# Altium PCB HX-SMJ-03-B.pcbdoc (part 2 of 2)
Units mil, origin at the board's own origin, x right, y up, seen from the top; angles counter-clockwise.
Board outline 10479.57 x 2985.31 mil, 2 copper layers (Top Layer, Bottom Layer); 242 components, 163 nets, 634 pads, 340 vias.
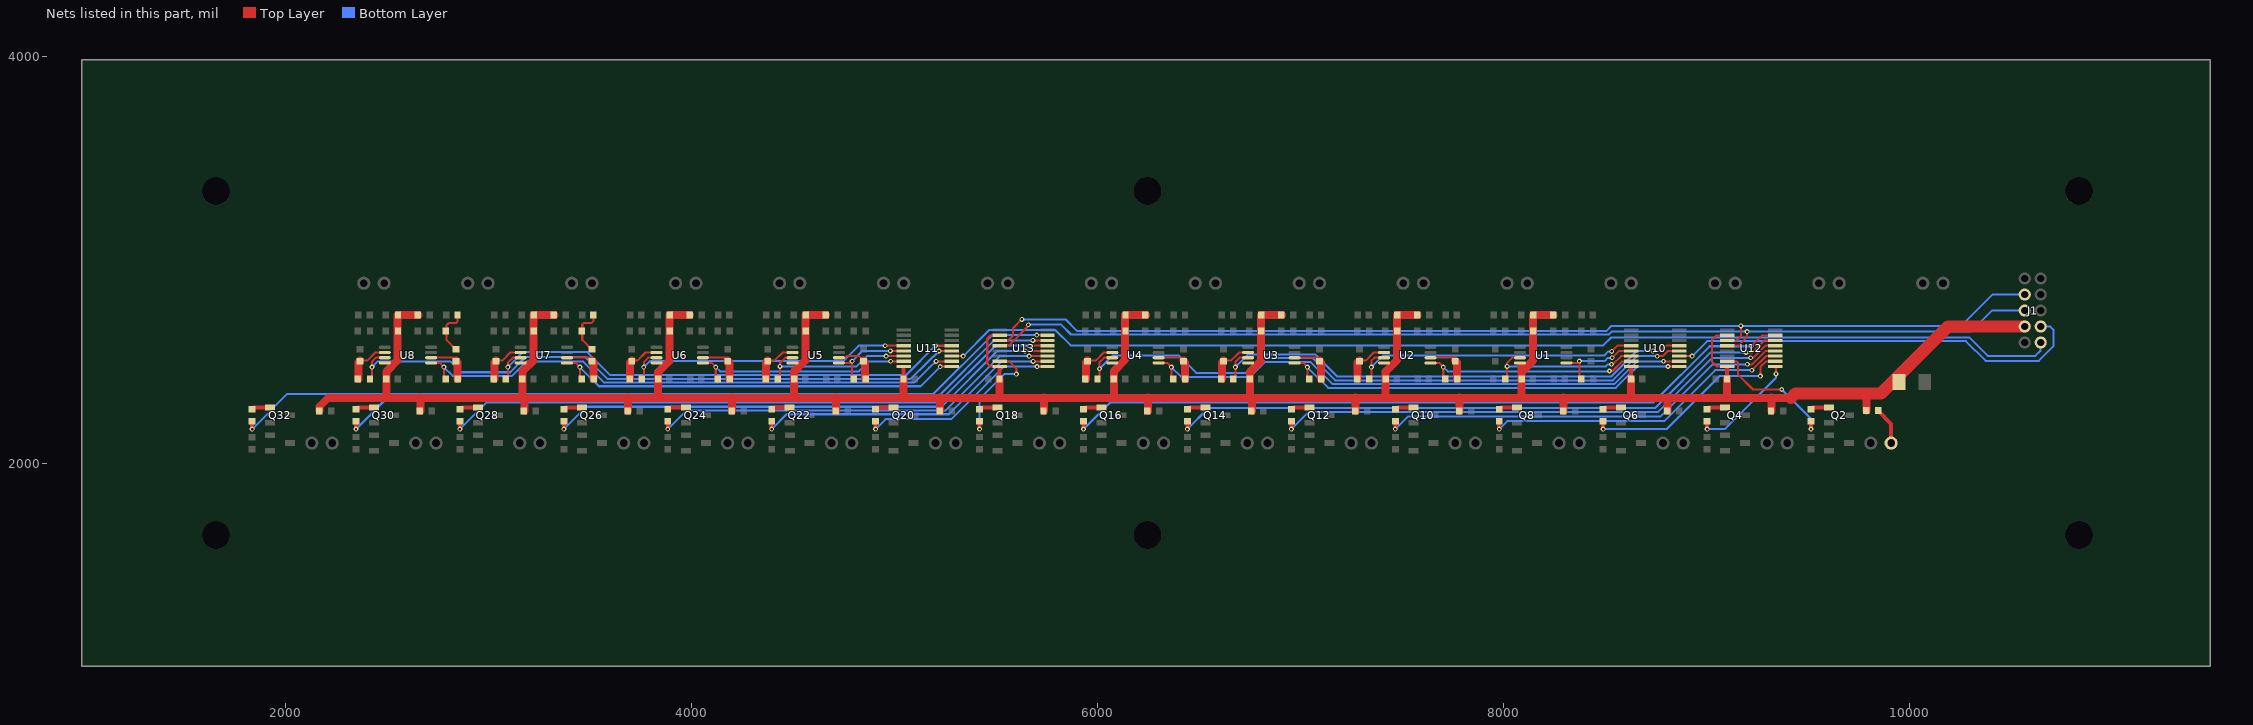
[diagram p2: the nets of this part, all layers, seen from the top]

## Via types
v1: diameter 24, hole 12, Top Layer to Bottom Layer, 328 vias
v2: diameter 27.56, hole 15.75, Top Layer to Bottom Layer, 12 vias

## Nets (pads, with @x,y where several pads share a name; then routed paths per layer and width w, separated by ;. In a path a pad name is that pad's centre, name@x,y a point inside that pad or via, vN(x,y) a via of type N, cw(c..) or ccw(c..) an arc to the next point about the centre after c; other vN are vias at no path point) (continued)
R68_2: C26.2 R64.2 R68.2 | length 233.9
  Top Layer w10: R64.2@3510.78,2559.59 3463.57,2606.79 3463.57,2650.09 3463.57,2682.39 3470.78,2689.69 3508.78,2689.69 3518.68,2699.49 C26.2@3518.68,2728.89
R78_2: C30.2 R74.2 R78.2 | length 232.8
  Top Layer w10: R74.2@2841.47,2559.59 2794.28,2606.79 2794.28,2650.09 2794.28,2677.59 2807.28,2690.69 2843.28,2690.69 2849.38,2696.69 C30.2@2849.38,2728.89
R81_2: D1.1 R81.2 | length 186.7
  Top Layer w19.68: R81.2@9844.17,2258.69 9909.17,2193.59 D1.1@9909.2,2098.93
R83_2: Q2.1 R83.2 | length 92.6
  Top Layer w19.68: R83.2@9514.67,2264.29 9524.58,2274.09 Q2.1@9603.3,2274.12
R86_2: Q4.1 R86.2 | length 92.6
  Top Layer w19.68: R86.2@9002.88,2264.29 9012.77,2274.09 Q4.1@9091.49,2274.13
R89_2: Q6.1 R89.2 | length 92.6
  Top Layer w19.68: R89.2@8491.08,2264.29 8500.98,2274.09 Q6.1@8579.68,2274.13
R92_2: Q8.1 R92.2 | length 92.7
  Top Layer w19.68: R92.2@7979.27,2264.29 7989.07,2274.09 Q8.1@8067.87,2274.12
R95_2: Q10.1 R95.2 | length 92.7
  Top Layer w19.68: R95.2@7467.48,2264.29 7477.27,2274.09 Q10.1@7556.06,2274.13
R98_2: Q12.1 R98.2 | length 92.7
  Top Layer w19.68: R98.2@6955.68,2264.29 6965.48,2274.09 Q12.1@7044.27,2274.09
R101_2: Q14.1 R101.2 | length 92.7
  Top Layer w19.68: R101.2@6443.88,2264.29 6453.68,2274.09 Q14.1@6532.48,2274.09
R104_2: Q16.1 R104.2 | length 92.6
  Top Layer w19.68: R104.2@5932.07,2264.29 5941.88,2274.09 Q16.1@6020.63,2274.12
R107_2: Q18.1 R107.2 | length 92.6
  Top Layer w19.68: R107.2@5420.27,2264.29 5430.07,2274.09 Q18.1@5508.82,2274.12
R110_2: Q20.1 R110.2 | length 92.6
  Top Layer w19.68: R110.2@4908.41,2264.28 R110.2@4918.25,2274.12 ; R110.2@4918.27,2274.09 Q20.1@4997.01,2274.12
R113_2: Q22.1 R113.2 | length 92.6
  Top Layer w19.68: R113.2@4396.57,2264.29 4406.48,2274.09 Q22.1@4485.2,2274.13
R116_2: Q24.1 R116.2 | length 92.7
  Top Layer w19.68: R116.2@3884.78,2264.29 3894.57,2274.09 Q24.1@3973.38,2274.12
R119_2: Q26.1 R119.2 | length 92.7
  Top Layer w19.68: R119.2@3372.97,2264.29 3382.78,2274.09 Q26.1@3461.57,2274.12
R122_2: Q28.1 R122.2 | length 92.7
  Top Layer w19.68: R122.2@2861.18,2264.29 2870.97,2274.09 Q28.1@2949.76,2274.12
R125_2: Q30.1 R125.2 | length 92.7
  Top Layer w19.68: R125.2@2349.38,2264.29 2359.18,2274.09 Q30.1@2437.95,2274.12
R128_2: Q32.1 R128.2 | length 92.7
  Top Layer w19.68: R128.2@1837.58,2264.29 1847.38,2274.09 Q32.1@1926.17,2274.09
RCLK: J1.5 U12.12 U13.12 | length 5306.6
  Top Layer w10: U13.12@5518.65,2578.27 5563.68,2578.29 5660.57,2675.19 v1@5660.57,2681.69 ; U12.12@9101.38,2578.29 9156.88,2578.29 9199.98,2621.39 v1@9199.98,2647.69
  Bottom Layer w10: v1(5660.56,2681.64) 5822.23,2681.64 5870.26,2633.61 8519.26,2633.61 8533.3,2647.64 v1(9199.97,2647.64) ; v1@9199.98,2647.69 10301.67,2647.69 10405.38,2751.39 J1.5@10567.08,2751.39
SRCLK: J1.3 U12.11 U13.11 | length 5337.4
  Top Layer w10: U13.11@5518.68,2603.89 5562.27,2603.89 5584.98,2626.59 5584.98,2664.09 v1@5628.57,2707.69 ; U12.11@9101.38,2603.89 9147.48,2603.89 9169.27,2625.69 v1@9169.27,2675.69
  Bottom Layer w10: v1(5628.56,2707.64) 5843.23,2707.64 5899.26,2651.61 8508.26,2651.61 8532.26,2675.61 v1(9169.26,2675.64) ; v1@9169.27,2675.69 10253.67,2675.69 10408.17,2830.19 J1.3@10567.08,2830.19
U2_2: R13.2 R14.1 U2.2 | length 222
  Top Layer w10: U2.2@7640.7,2519.2 7747.98,2519.19 R14.1@7762.77,2504.49
  Top Layer w39.37: R14.1@7762.68,2504.39 7770.57,2496.59 R13.2@7770.57,2413.89
U2_6: R15.2 R16.1 U2.6 | length 232.7
  Top Layer w10: R15.2@7290.27,2504.39 7321.77,2504.39 7362.07,2544.79 U2.6@7412.36,2544.8
  Top Layer w39.37: R16.1@7282.38,2413.89 7282.38,2496.59 R15.2@7290.27,2504.39
U3_2: R23.2 R24.1 U3.2 | length 222
  Top Layer w10: U3.2@6971.4,2519.21 7078.68,2519.19 R24.1@7093.48,2504.49
  Top Layer w39.37: R24.1@7093.48,2504.49 7101.27,2496.59 R23.2@7101.27,2413.89
U3_6: R25.2 R26.1 U3.6 | length 232.6
  Top Layer w10: R25.2@6620.98,2504.49 6657.88,2504.49 6698.27,2544.79 U3.6@6743.05,2544.81
  Top Layer w39.37: R26.1@6613.07,2413.89 6613.07,2496.59 R25.2@6620.98,2504.49
U4_2: R33.2 R34.1 U4.2 | length 222
  Top Layer w10: U4.2@6302.09,2519.21 6409.38,2519.19 R34.1@6424.18,2504.49
  Top Layer w39.37: R34.1@6424.18,2504.49 6431.98,2496.59 R33.2@6431.98,2413.89
U4_6: R35.2 R36.1 U4.6 | length 232.6
  Top Layer w10: R35.2@5951.68,2504.49 5992.07,2504.49 6032.38,2544.79 U4.6@6073.77,2544.79
  Top Layer w39.37: R36.1@5943.88,2413.89 5943.88,2496.59 R35.2@5951.68,2504.49
U5_2: R43.2 R44.1 U5.2 | length 228.1
  Top Layer w10: U5.2@4727.38,2519.19 4757.88,2519.19 4765.27,2526.59 4827.18,2526.59 R44.1@4849.38,2504.39
  Top Layer w39.37: R44.1@4849.38,2504.49 4857.18,2496.59 R43.2@4857.18,2413.89
U5_6: R45.2 R46.1 U5.6 | length 232.2
  Top Layer w10: R45.2@4376.88,2504.49 4409.68,2504.49 4451.68,2544.79 U5.6@4498.98,2544.81
  Top Layer w39.37: R46.1@4368.98,2413.89 4368.98,2496.59 R45.2@4376.88,2504.49
U6_2: R53.2 R54.1 U6.2 | length 222
  Top Layer w10: U6.2@4058,2519.21 4165.27,2519.19 R54.1@4180.07,2504.49
  Top Layer w39.37: R54.1@4180.07,2504.49 4187.98,2496.59 R53.2@4187.98,2413.89
U6_6: R55.2 R56.1 U6.6 | length 232.6
  Top Layer w10: R55.2@3707.57,2504.49 3734.68,2504.49 3774.97,2544.79 U6.6@3829.65,2544.81
  Top Layer w39.37: R56.1@3699.78,2413.89 3699.78,2496.59 R55.2@3707.57,2504.49
U7_2: R63.2 R64.1 U7.2 | length 221.9
  Top Layer w10: U7.2@3388.78,2519.19 3495.97,2519.19 R64.1@3510.78,2504.49
  Top Layer w39.37: R64.1@3510.78,2504.49 3518.68,2496.59 R63.2@3518.68,2413.89
U7_6: R65.2 R66.1 U7.6 | length 232.5
  Top Layer w10: R65.2@3038.38,2504.49 3069.57,2504.49 3109.97,2544.79 U7.6@3160.39,2544.81
  Top Layer w39.37: R66.1@3030.47,2413.89 3030.47,2496.59 R65.2@3038.38,2504.49
U8_2: R73.2 R74.1 U8.2 | length 221.9
  Top Layer w10: U8.2@2719.47,2519.19 2826.68,2519.19 R74.1@2841.47,2504.49
  Top Layer w39.37: R74.1@2841.47,2504.49 2849.38,2496.59 R73.2@2849.38,2413.89
U8_6: R75.2 R76.1 U8.6 | length 232.5
  Top Layer w10: R75.2@2369.07,2504.49 2404.57,2504.49 2444.97,2544.79 U8.6@2491.08,2544.82
  Top Layer w39.37: R76.1@2361.18,2413.89 2361.18,2496.59 R75.2@2369.07,2504.49
VCC: C1.1 C5.1 C9.1 C13.1 C17.1 C21.1 C25.1 C29.1 C34.2 C35.2 C36.2 C37.2 C38.2 J1.7 R1.1 R2.1 R7.2 R11.1 R12.1 R17.2 R21.1 R22.1 R27.2 R31.1 R32.1 R37.2 R41.1 R42.1 R47.2 R51.1 R52.1 R57.2 R61.1 R62.1 R67.2 R71.1 R72.1 R77.2 R81.1 R84.1 R87.1 R90.1 R93.1 R96.1 R99.1 R102.1 R105.1 R108.1 R111.1 R114.1 R117.1 R120.1 R123.1 R126.1 U1.8 U2.8 U3.8 U4.8 U5.8 U6.8 U7.8 U8.8 U10.16 U11.16 U12.10 U12.16 U13.10 U13.16 | length 15144.9
  Top Layer w10: U13.16@5518.68,2475.89 5472.77,2475.89 5457.98,2490.69 5457.98,2613.69 5473.77,2629.49 U13.10@5518.68,2629.49 ; U12.16@9101.38,2475.89 9050.27,2475.89 9027.98,2498.29 9027.98,2608.99 9048.38,2629.39 U12.10@9101.38,2629.39
  Top Layer w19.68: C37.2@5045.27,2409.69 U11.16@5045.77,2471.69 ; 5045.68,2322.59 C37.2@5045.72,2413.89 ; C35.2@5518.18,2409.59 U13.16@5518.27,2471.59 ; 5518.57,2322.59 C35.2@5518.57,2413.89 ; C36.2@8628.27,2410.69 U10.16@8628.48,2472.89 ; C34.2@9101.27,2410.69 U12.16@9101.77,2472.69
  Top Layer w39.37: R126.1@2168.88,2258.69 2168.88,2278.09 2212.28,2321.49 9416.67,2321.49 ; 2498.97,2322.59 C29.1@2499.02,2413.89 2498.97,2451.29 2554.07,2506.49 2554.07,2650.09 2554.07,2728.89 R71.1@2656.47,2728.89 ; R123.1@2666.28,2256.39 2666.28,2322.59 ; 3168.28,2322.59 C25.1@3168.32,2413.89 3168.28,2450.69 3223.38,2505.79 3223.38,2650.09 3223.38,2728.89 R61.1@3325.78,2728.89 ; R120.1@3178.07,2256.39 3178.07,2322.59 ; R117.1@3689.88,2256.39 3689.88,2322.59 ; 3837.57,2322.59 3837.57,2413.89 3837.57,2448.89 3892.68,2503.99 3892.68,2650.09 3892.68,2728.89 R51.1@3994.97,2728.89 ; R114.1@4201.68,2256.39 4201.68,2322.59 ; 4506.77,2322.59 C17.1@4506.82,2413.89 ; C17.1@4506.88,2413.89 4506.88,2451.19 4561.98,2506.29 4561.98,2650.09 4561.98,2728.89 R41.1@4664.27,2728.89 ; R111.1@4713.48,2256.39 4713.48,2322.59 ; 5045.68,2322.59 C37.2@5045.72,2413.89 ; R108.1@5225.38,2256.39 5225.38,2322.59 ; 5518.57,2333.19 C35.2@5518.57,2413.89 ; R105.1@5737.18,2256.39 5737.18,2322.59 ; 6081.68,2322.59 6081.68,2413.89 6081.68,2454.19 6136.77,2509.29 6136.77,2650.09 6136.77,2728.89 R31.1@6239.07,2728.89 ; R102.1@6248.98,2256.39 6248.98,2322.59 ; 6750.98,2322.59 6750.98,2413.89 6750.98,2449.49 6806.07,2504.59 6806.07,2650.09 6806.07,2728.89 R21.1@6908.38,2728.89 ; R99.1@6760.77,2256.39 6760.77,2322.59 ; R96.1@7272.57,2256.39 7272.57,2322.59 ; 7420.18,2322.59 C5.1@7420.22,2413.89 7420.18,2451.69 7475.27,2506.79 R17.2@7475.27,2650.09 ; R17.2@7475.38,2650.09 7475.38,2728.89 R11.1@7577.68,2728.89 ; R93.1@7784.38,2256.39 7784.38,2322.59 ; 8089.48,2322.59 C1.1@8089.52,2413.89 8089.48,2449.09 ; 8089.5,2477 8089.5,2449.09 ; R7.2@8144.57,2650.09 8144.57,2728.89 R1.1@8246.98,2728.89 ; 8145.57,2625.79 8145.57,2505.19 8089.48,2449.09 ; R90.1@8296.17,2256.39 8296.17,2322.59 ; 8628.67,2322.59 C36.2@8628.67,2413.69 ; R87.1@8807.98,2256.39 8807.98,2322.59 ; 9100.88,2322.59 C34.2@9100.88,2413.89 ; R84.1@9319.77,2256.39 9319.77,2322.59 ; R81.1@9788.98,2258.69 9788.98,2322.59
  Top Layer w59.05: 9416.67,2321.49 9437.77,2342.59 9859.38,2342.59 10189.38,2672.59 J1.7@10567.08,2672.59
X0: R3.1 U1.1 U10.13 | length 436.3
  Top Layer w10: U1.1@8310,2493.59 8365.17,2493.59 v1(8374.26,2502.64) 8374.27,2424.39 R3.1@8384.77,2413.89 ; v1@8535.27,2518.69 8536.67,2518.69 8570.77,2552.69 U10.13@8628.88,2552.68
  Bottom Layer w10: v1(8374.26,2502.64) 8498.26,2502.61 8514.26,2518.61 v1(8535.27,2518.64)
X01: R83.1 U12.15 | length 656.4
  Top Layer w10: U12.15@9101.38,2501.49 9147.67,2501.49 9155.58,2493.69 9155.58,2435.99 9228.98,2362.69 v1@9370.58,2362.69
  Top Layer w19.68: v1(9514.69,2167.82) 9514.7,2182.23 ; 9514.67,2182.19 R83.1@9514.67,2209.19
  Bottom Layer w10: v1(9370.57,2362.64) 9514.7,2218.52 v1(9514.69,2167.82)
X1: R6.2 U1.7 U10.14 | length 789.9
  Top Layer w10: R6.2@8006.77,2413.89 8018.27,2425.39 v1(8018.27,2476.64) 8018.27,2493.39 8044.07,2519.19 U1.7@8081.66,2519.19 ; v1(8532.26,2486.64) 8539.27,2486.59 8579.67,2527.09 U10.14@8628.88,2527.09
  Bottom Layer w10: v1(8018.27,2476.64) 8504.26,2476.61 8514.26,2486.61 v1(8532.26,2486.64)
X02: R86.1 U12.1 | length 543.1
  Top Layer w10: U12.1@9337.58,2475.89 9342.27,2471.19 v1@9342.27,2439.69
  Top Layer w19.68: v1(9002.89,2167.83) R86.1@9002.88,2209.19
  Bottom Layer w10: v1(9002.89,2167.83) 9090.16,2167.84 9342.27,2419.95 v1(9342.26,2439.64)
X2: R13.1 U2.1 U10.15 | length 1090.2
  Top Layer w10: U2.1@7640.7,2493.59 7683.07,2493.59 7703.68,2472.99 7703.68,2425.69 R13.1@7715.48,2413.89 ; v1(8522.26,2453.64) 8537.27,2453.59 8585.17,2501.49 U10.15@8628.88,2501.5
  Bottom Layer w10: v1(7703.69,2472.95) 7724.99,2451.64 8520.27,2451.64 v1(8522.26,2453.64)
X03: R89.1 U12.2 | length 1052.2
  Top Layer w10: v1@9265.38,2428.69 9265.38,2473.19 9293.67,2501.49 U12.2@9337.58,2501.49
  Top Layer w19.68: v1(8491.08,2167.83) R89.1@8491.08,2209.19
  Bottom Layer w10: v1(8491.08,2167.83) 8803.16,2167.81 9063.99,2428.64 v1(9265.4,2428.64)
X3: R16.2 U2.7 U10.12 | length 1486.9
  Top Layer w10: R16.2@7337.48,2413.89 7349.38,2425.69 7349.38,2472.99 7349.77,2503.69 7365.27,2519.19 U2.7@7412.36,2519.2 ; v1@8533.27,2550.69 8560.88,2578.29 U10.12@8628.88,2578.27
  Bottom Layer w10: v1(7349.35,2472.95) 7406.06,2529.61 8495.26,2529.61 8516.26,2550.61 v1(8533.26,2550.64)
X04: R92.1 U12.3 | length 1548.5
  Top Layer w10: v1@9223.58,2457.69 9292.98,2527.09 U12.3@9337.58,2527.09
  Top Layer w19.68: v1(7979.26,2167.83) R92.1@7979.27,2209.19
  Bottom Layer w10: v1(7979.26,2167.83) 8018.07,2206.64 8791.97,2206.64 9042.97,2457.64 v1(9223.57,2457.64)
X4: R23.1 U3.1 U10.1 | length 2052.2
  Top Layer w10: U3.1@6971.4,2493.61 7013.77,2493.59 v1(7034.4,2472.96) 7034.38,2425.69 R23.1@7046.18,2413.89 ; v1(8810.26,2475.91) U10.1@8865.1,2475.91
  Bottom Layer w10: v1(7034.4,2472.96) 7136.72,2370.64 8553.27,2370.64 8658.53,2475.91 v1(8810.26,2475.91)
X05: R95.1 U12.4 | length 2070.9
  Top Layer w10: v1@9201.58,2486.69 9224.88,2486.69 9290.88,2552.69 U12.4@9337.58,2552.69
  Top Layer w19.68: v1@7467.48,2167.79 R95.1@7467.48,2209.19
  Bottom Layer w10: v1(7467.44,2167.83) 7530.26,2230.64 8773.97,2230.64 9029.97,2486.64 v1(9201.57,2486.64)
X5: R26.2 U3.7 U10.5 | length 2479.7
  Top Layer w10: R26.2@6668.27,2413.89 6680.07,2425.69 6680.07,2472.99 6680.07,2497.89 6701.38,2519.19 U3.7@6743.05,2519.21 ; v1(8736.26,2552.64) 8772.27,2552.59 8797.88,2578.29 U10.5@8865.1,2578.27
  Bottom Layer w10: v1(6680.06,2472.95) 6742.76,2535.64 7072.27,2535.64 7181.27,2426.64 8531.73,2426.64 8657.73,2552.64 v1(8736.26,2552.64)
X06: R98.1 U12.5 | length 2593.3
  Top Layer w10: v1@9217.58,2518.69 9229.88,2518.69 9289.48,2578.29 U12.5@9337.58,2578.29
  Top Layer w19.68: v1@6955.68,2167.79 R98.1@6955.68,2209.19
  Bottom Layer w10: v1(6955.65,2167.83) 7040.46,2252.64 8761.97,2252.64 9027.97,2518.64 v1(9217.57,2518.64)
X6: R33.1 U4.1 U10.2 | length 2778.5
  Top Layer w10: U4.1@6302.09,2493.61 6344.48,2493.59 6365.07,2472.99 6365.07,2425.69 R33.1@6376.88,2413.89 ; v1(8788.26,2501.5) U10.2@8865.1,2501.5
  Bottom Layer w10: v1(6365.1,2472.95) 6413.36,2424.61 6752.06,2424.61 6826.06,2498.61 7049.26,2498.61 7159.26,2388.61 8545.26,2388.61 8658.16,2501.51 v1(8788.26,2501.5)
X07: R101.1 U12.6 | length 3115.7
  Top Layer w10: v1@9194.58,2545.69 9225.88,2545.69 9284.08,2603.89 U12.6@9337.58,2603.89
  Top Layer w19.68: v1@6443.88,2167.79 R101.1@6443.88,2209.19
  Bottom Layer w10: v1(6443.84,2167.82) 6547.66,2271.64 8746.97,2271.64 9020.97,2545.64 v1(9194.57,2545.64)
X7: R36.2 U4.7 U10.4 | length 3212.8
  Top Layer w10: R36.2@5998.98,2413.89 6010.77,2425.69 6010.77,2472.99 6010.77,2496.39 6033.57,2519.19 U4.7@6073.77,2519.19 ; v1(8757.26,2526.64) 8784.27,2526.59 8810.27,2552.69 U10.4@8865.1,2552.68
  Bottom Layer w10: v1(6010.77,2465.08) 6076.34,2530.64 6401.27,2530.64 6487.27,2444.64 6736.27,2444.64 6809.27,2517.64 7061.27,2517.64 7171.27,2407.64 8538.27,2407.64 8657.27,2526.64 v1(8757.26,2526.64)
X8: R43.1 U5.1 U11.13 | length 435.4
  Top Layer w10: U5.1@4727.38,2493.59 4784.27,2493.59 v1(4792.27,2501.64) 4792.27,2423.69 R43.1@4802.07,2413.89 ; v1(4981.27,2553.1) 5045.77,2553.09 U11.13@5046.21,2552.68
  Bottom Layer w10: v1(4792.27,2501.64) 4843.73,2553.1 v1(4981.27,2553.1)
X08: R104.1 U12.7 | length 3638.1
  Top Layer w10: v1@9220.58,2575.69 9274.38,2629.39 U12.7@9337.58,2629.39
  Top Layer w19.68: v1@5932.07,2167.79 R104.1@5932.07,2209.19
  Bottom Layer w10: v1(5932.02,2167.83) 6062.84,2298.64 8737.97,2298.64 9014.97,2575.64 v1(9220.57,2575.64)
X9: R46.2 U5.7 U11.14 | length 786.9
  Top Layer w10: R46.2@4424.18,2413.89 4437.27,2427.09 v1(4437.27,2476.64) 4437.27,2493.09 4463.38,2519.19 U5.7@4498.98,2519.21 ; v1(4959.88,2527.09) U11.14@5046.21,2527.09
  Bottom Layer w10: v1(4437.27,2476.64) 4814.36,2476.61 4864.86,2527.11 v1(4959.88,2527.09)
X09: R107.1 U13.15 | length 546.9
  Top Layer w10: U13.15@5518.68,2501.49 5565.68,2501.49 5601.57,2465.69 v1@5601.57,2438.69
  Top Layer w19.68: v1@5420.27,2167.79 R107.1@5420.27,2209.19
  Bottom Layer w10: v1(5420.22,2167.82) 5420.22,2316.89 5541.97,2438.64 v1(5601.56,2438.64)
X10: R53.1 U6.1 U11.15 | length 1090.2
  Top Layer w10: U6.1@4058,2493.61 4100.38,2493.59 4120.98,2472.99 4120.98,2425.69 R53.1@4132.77,2413.89 ; v1(4982.27,2501.5) U11.15@5046.21,2501.5
  Bottom Layer w10: v1(4120.99,2472.95) 4142.26,2451.61 4825.26,2451.61 4875.16,2501.51 v1(4982.27,2501.5)
X010: R110.1 U13.1 | length 1015.2
  Top Layer w10: v1(5703.01,2475.1) U13.1@5754.87,2475.91
  Top Layer w19.68: v1(4908.4,2167.82) R110.1@4908.38,2209.19
  Bottom Layer w10: v1(4908.4,2167.82) 4957.23,2216.64 5279.97,2216.64 5538.43,2475.1 v1(5703.01,2475.1)
X11: R56.2 U6.7 U11.12 | length 1483.6
  Top Layer w10: R56.2@3754.88,2413.89 3766.68,2425.69 3766.68,2472.99 3766.68,2497.49 3788.38,2519.19 U6.7@3829.65,2519.21 ; v1(4955.27,2578.27) U11.12@5046.21,2578.27
  Bottom Layer w10: v1(3766.66,2472.95) 3796.36,2502.61 4749.36,2502.61 4825.06,2578.31 v1(4955.27,2578.27)
X011: R113.1 U13.2 | length 1537.9
  Top Layer w10: v1(5684.01,2501.1) 5754.48,2501.09 U13.2@5754.87,2501.5
  Top Layer w19.68: v1(4396.6,2167.82) R113.1@4396.57,2209.19
  Bottom Layer w10: v1(4396.6,2167.82) 4469.42,2240.64 5268.97,2240.64 5529.43,2501.1 v1(5684.01,2501.1)
X12: R63.1 U7.1 U11.1 | length 2045.2
  Top Layer w10: U7.1@3388.78,2493.59 3431.07,2493.59 3451.68,2472.99 3451.68,2425.69 R63.1@3463.57,2413.89 ; v1(5226.27,2475.1) U11.1@5282.48,2475.89
  Bottom Layer w10: v1@3451.76,2472.91 3546.07,2378.61 5129.77,2378.61 v1(5226.27,2475.1)
  other v1: 3451.72,2472.95
X012: R116.1 U13.3 | length 2060.3
  Top Layer w10: v1(5664.01,2527.1) U13.3@5754.87,2527.09
  Top Layer w19.68: v1(3884.78,2167.82) R116.1@3884.78,2209.19
  Bottom Layer w10: v1(3884.78,2167.82) 3975.61,2258.64 5250.97,2258.64 5519.43,2527.1 v1(5664.01,2527.1)
X13: R66.2 U7.7 U11.5 | length 2637.8
  Top Layer w10: R66.2@3085.57,2413.89 3097.38,2425.69 3097.38,2472.99 3097.38,2494.19 3122.38,2519.19 U7.7@3160.39,2519.21 ; v1(5202.27,2578.1) U11.5@5282.27,2578.09 ; U11.5@5282.27,2578.1 U11.5@5282.43,2578.27
  Bottom Layer w10: v1(3097.39,2472.95) 3171.06,2546.61 3488.61,2546.61 3601.6,2433.61 5057.76,2433.61 v1(5202.27,2578.1) 5091.27,2467.11
X013: R119.1 U13.4 | length 2582.8
  Top Layer w10: v1(5643.01,2552.1) 5754.27,2552.09 U13.4@5754.87,2552.68
  Top Layer w19.68: v1(3372.97,2167.82) R119.1@3372.97,2209.19
  Bottom Layer w10: v1(3372.97,2167.82) 3482.8,2277.64 5232.97,2277.64 5507.43,2552.1 v1(5643.01,2552.1)
X14: R73.1 U8.1 U11.2 | length 2767.7
  Top Layer w10: U8.1@2719.47,2493.59 2761.78,2493.59 2782.47,2472.99 2782.47,2425.69 R73.1@2794.28,2413.89 ; v1(5206.27,2501.1) U11.2@5282.07,2501.09 ; U11.2@5282.03,2501.11 U11.2@5282.43,2501.5
  Bottom Layer w10: v1@2782.46,2472.91 2825.76,2429.61 3118.26,2429.61 3188.26,2499.61 3468.61,2499.61 3571.61,2396.61 5098.66,2396.61 5171.76,2469.71 v1(5206.27,2501.1)
  other v1: 2782.43,2472.95
X014: R122.1 U13.5 | length 3101.1
  Top Layer w10: v1@5667.98,2578.29 U13.5@5754.87,2578.27
  Top Layer w19.68: v1(2861.16,2167.82) R122.1@2861.18,2209.19
  Bottom Layer w10: v1(2861.16,2167.82) 2992.99,2299.64 5219.98,2299.64 5498.6,2578.27 v1(5663.99,2578.27)
X15: R76.2 U8.7 U11.4 | length 3182.7
  Top Layer w10: R76.2@2416.28,2413.89 2428.07,2425.69 2428.07,2472.99 2428.07,2499.89 2447.38,2519.19 U8.7@2491.08,2519.22 ; v1(5221.27,2552.1) U11.4@5281.88,2552.09 ; U11.4@5281.85,2552.11 U11.4@5282.43,2552.68
  Bottom Layer w10: v1(2428.09,2472.95) 2456.76,2501.61 2814.26,2501.61 2868.26,2447.61 3109.26,2447.61 3184.26,2522.61 3479.61,2522.61 3587.6,2414.61 5080.96,2414.61 5161.86,2495.61 v1(5221.27,2552.1)
X015: R125.1 U13.6 | length 3628.2
  Top Layer w10: v1@5682.57,2604.69 5754.07,2604.69 U13.6@5754.87,2603.86
  Top Layer w19.68: v1@2349.38,2167.79 R125.1@2349.38,2209.19
  Bottom Layer w10: v1@2349.38,2167.77 2502.18,2320.57 5208.98,2320.57 5492.98,2604.67 v1@5682.58,2604.67
  other v1: 2349.34,2167.82 5682.56,2604.64
X016: R128.1 U13.7 | length 4150.9
  Top Layer w10: v1@5701.57,2630.69 5753.68,2630.69 U13.7@5754.88,2629.49
  Top Layer w19.68: v1@1837.58,2167.79 R128.1@1837.58,2209.19
  Bottom Layer w10: v1(1837.54,2167.83) 2009.35,2339.64 5190.97,2339.64 5481.97,2630.64 v1(5701.56,2630.64)
X_IN3: J1.8 U10.3 | length 2094.7
  Top Layer w10: U10.3@8865.1,2527.09 v1(8929.26,2527.09)
  Bottom Layer w10: v1(8929.26,2527.09) 9002.88,2600.59 10277.17,2600.59 10374.38,2503.39 10636.38,2503.39 10708.38,2575.39 10708.38,2657.39 10693.17,2672.59 J1.8@10645.77,2672.59
X_IN4: J1.10 U11.3 | length 5552.5
  Top Layer w10: U11.3@5282.48,2527.09 v1(5339.27,2527.1)
  Bottom Layer w10: v1(5339.27,2527.1) 5467.77,2655.69 5793.27,2655.69 5869.27,2579.59 8492.27,2579.59 8532.27,2619.59 10293.17,2619.59 10384.38,2528.39 10619.38,2528.39 10645.77,2554.79 J1.10@10645.77,2593.89
pads on no net: U13.9

## Polygon pours and split planes (outlines as drawn)
GND on Bottom Layer (solid): 1522.58,1508.4 1522.58,3476.4 10971.58,3476.4 10971.58,1508.4
GND on Top Layer (solid): 1500,1507.35 1500,3475.34 10949,3475.34 10949,1507.35

## Keep-outs
Keep-Out Layer:
  lines w10: 1522.59,1646.2 ccw(c1660.38,1646.2) 1660.38,1508.4 ; 10833.61,1508.4 ccw(c10833.61,1646.2) 10971.41,1646.2 ; 10833.61,3476.91 cw(c10833.61,3339.11) 10971.41,3339.11 ; 1522.59,3339.11 cw(c1660.38,3339.11) 1660.38,3476.91 ccw(c1660.38,3339.11) 1522.58,3339.11

## Other copper
Top Layer:
  drawing of 551 lines, arcs and shapes, not listed
Bottom Layer:
  region net X01: 9523.7,2175.75 9505.7,2175.76 9509.7,2184.16 9519.7,2184.15
  region net X8: 4804.24,2500.88 4791.52,2513.61 4800.28,2516.72 4807.35,2509.65
  region net X9: 4445.22,2485.62 4445.19,2467.62 4453.59,2471.61 4453.61,2481.61
  region net X10: 4132.97,2473.66 4120.2,2460.97 4128.96,2457.83 4136.06,2464.88
  region net X11: 3778.64,2472.18 3765.93,2484.93 3774.7,2488.02 3781.76,2480.94
  region net X12: 3463.69,2473.7 3450.97,2460.97 3459.74,2457.86 3466.81,2464.94
  region net X13: 3109.36,2472.19 3096.64,2484.92 3105.41,2488.03 3112.48,2480.95
  region net X14: 2794.4,2473.7 2781.67,2460.97 2790.44,2457.86 2797.51,2464.93
  region net X15: 2440.07,2472.19 2427.35,2484.92 2436.12,2488.03 2443.18,2480.96
  region net D32_2: 2458.39,2740.84 2445.65,2728.13 2442.54,2736.9 2449.62,2743.96
  region net D31_2: 2764.87,2728.1 2752.15,2740.84 2760.92,2743.94 2767.98,2736.87
  region net D30_2: 3138.89,2728.1 3126.17,2740.84 3134.94,2743.94 3142.01,2736.87
  region net D29_2: 3430.13,2719.86 3430.12,2737.86 3438.52,2733.86 3438.52,2723.86
  region net D28_2: 3804.14,2719.86 3804.14,2737.86 3812.54,2733.86 3812.54,2723.86
  region net D27_2: 4103.46,2728.11 4090.73,2740.84 4099.5,2743.95 4106.57,2736.88
  region net D26_2: 4477.47,2728.12 4464.74,2740.84 4473.51,2743.96 4480.58,2736.88
  region net D25_2: 4768.71,2719.87 4768.71,2737.87 4777.11,2733.87 4777.11,2723.87
  region net IN_U6: 4054.02,2597.81 4054.02,2615.81 4045.62,2611.81 4045.62,2601.81
  region net IN_U8: 2495.08,2597.81 2495.08,2615.81 2503.48,2611.81 2503.48,2601.81
  region net IN_U8: 2715.44,2597.81 2715.44,2615.81 2707.04,2611.81 2707.04,2601.81
  region net IN_U7: 3168.34,2597.81 3168.34,2615.81 3176.74,2611.81 3176.74,2601.81
  region net IN_U7: 3379.85,2597.81 3379.85,2615.81 3371.45,2611.81 3371.45,2601.81
  region net IN_U5: 4722.13,2617.15 4722.13,2596.48 4712.48,2601.81 4712.48,2611.81
  region net IN_U5: 4504.14,2596.48 4504.13,2617.15 4513.78,2611.81 4513.78,2601.81
  region net IN_U6: 3833.67,2597.81 3833.66,2615.81 3842.06,2611.81 3842.06,2601.81
  region net X09: 5429.22,2175.75 5411.22,2175.76 5415.22,2184.16 5425.22,2184.15
  region net X08: 5944,2167.08 5931.27,2179.8 5940.04,2182.92 5947.11,2175.85
  region net X07: 6455.81,2167.07 6443.08,2179.79 6451.85,2182.91 6458.92,2175.84
  region net X06: 6967.62,2167.08 6954.89,2179.8 6963.66,2182.92 6970.73,2175.85
  region net X05: 7479.42,2167.08 7466.69,2179.8 7475.46,2182.92 7482.53,2175.85
  region net X04: 7991.23,2167.08 7978.5,2179.8 7987.27,2182.92 7994.34,2175.85
  region net X03: 8499.02,2176.82 8499,2158.82 8507.41,2162.81 8507.41,2172.81
  region net X02: 9010.83,2158.83 9010.82,2176.83 9019.22,2172.84 9019.22,2162.84
  region net X1: 8026.22,2485.62 8026.19,2467.62 8034.59,2471.61 8034.61,2481.61
  region net C2_1: 8357.21,2731.94 8342.59,2746.55 8353.19,2749.6 8360.26,2742.53
  region net R2_2: 8057.29,2722.47 8057.29,2743.14 8066.94,2737.8 8066.94,2727.8
  region net IN_U1: 8304.82,2617.15 8304.82,2596.48 8295.17,2601.81 8295.17,2611.81
  region net IN_U1: 8086.82,2596.48 8086.82,2617.15 8096.46,2611.81 8096.47,2601.81
  region net D20_2: 7388,2722.47 7388,2743.14 7397.64,2737.8 7397.65,2727.8
  region net D19_2: 7687.91,2731.93 7673.29,2746.55 7683.89,2749.6 7690.96,2742.53
  region net D22_2: 6723.35,2731.93 6708.73,2746.55 6719.33,2749.6 6726.4,2742.53
  region net D21_2: 7018.62,2731.94 7004,2746.55 7014.6,2749.6 7021.67,2742.53
  region net D24_2: 6054.05,2731.94 6039.43,2746.55 6050.03,2749.6 6057.1,2742.53
  region net D23_2: 6344.69,2722.47 6344.69,2743.14 6354.33,2737.8 6354.34,2727.8
  region net IN_U2: 7416.35,2597.81 7416.34,2615.81 7424.74,2611.81 7424.75,2601.81
  region net IN_U2: 7636.71,2597.81 7636.71,2615.81 7628.31,2611.81 7628.31,2601.81
  region net X0: 8382.22,2511.62 8382.19,2493.62 8390.59,2497.61 8390.61,2507.61
  region net X2: 7715.66,2473.7 7702.93,2460.97 7711.7,2457.86 7718.77,2464.93
  region net X3: 7361.33,2472.17 7348.63,2484.93 7357.4,2488.02 7364.46,2480.94
  region net X4: 7046.37,2473.71 7033.64,2460.98 7042.41,2457.87 7049.48,2464.94
  region net X5: 6692.04,2472.2 6679.32,2484.92 6688.08,2488.04 6695.15,2480.96
  region net X6: 6377.08,2473.66 6364.31,2460.97 6373.07,2457.83 6380.16,2464.88
  region net X7: 6022.75,2464.33 6010.02,2477.06 6018.79,2480.17 6025.86,2473.09
  region net IN_U3: 6747.05,2597.81 6747.05,2615.81 6755.45,2611.81 6755.45,2601.81
  region net IN_U3: 6967.4,2597.81 6967.4,2615.81 6959,2611.81 6959,2601.81
  region net IN_U4: 6298.11,2597.81 6298.1,2615.81 6289.71,2611.81 6289.7,2601.81
  region net IN_U4: 6077.76,2597.81 6077.76,2615.81 6086.16,2611.81 6086.16,2601.81
  region net X11: 4947.35,2587.29 4947.31,2569.29 4938.92,2573.31 4938.94,2583.31
  region net X8: 4973.33,2544.09 4973.32,2562.09 4964.93,2558.1 4964.92,2548.1
  region net X9: 4951.95,2536.1 4951.93,2518.1 4943.53,2522.11 4943.55,2532.11
  region net X10: 4974.33,2510.5 4974.32,2492.5 4965.92,2496.51 4965.93,2506.51
  region net X13: 5203.02,2566.12 5190.29,2578.85 5187.18,2570.08 5194.25,2563.01
  region net X13: 5203.01,2566.12 5190.29,2578.86 5187.17,2570.09 5194.23,2563.02
  region net X15: 5221.71,2540.11 5209.31,2553.16 5205.98,2544.47 5212.86,2537.22
  region net X_IN4: 5351.24,2526.34 5338.52,2539.08 5347.29,2542.18 5354.36,2535.11
  region net X14: 5206.44,2489.1 5194.34,2502.42 5190.81,2493.81 5197.54,2486.41
  region net X12: 5227.01,2463.12 5214.29,2475.85 5211.18,2467.08 5218.25,2460.01
  region net X016: 1849.51,2167.07 1836.78,2179.8 1845.55,2182.91 1852.62,2175.84
  region net X015: 2361.32,2167.02 2348.64,2179.8 2357.42,2182.88 2364.46,2175.78
  region net X014: 2873.14,2167.07 2860.42,2179.8 2869.18,2182.91 2876.25,2175.83
  region net X013: 3384.95,2167.07 3372.22,2179.79 3380.99,2182.91 3388.06,2175.84
  region net X012: 3896.76,2167.07 3884.03,2179.79 3892.8,2182.91 3899.87,2175.84
  region net X011: 4408.57,2167.07 4395.84,2179.79 4404.61,2182.91 4411.68,2175.84
  region net X010: 4920.38,2167.07 4907.65,2179.79 4916.42,2182.91 4923.49,2175.84
  region net X010: 5695.07,2466.1 5695.07,2484.1 5686.67,2480.1 5686.67,2470.1
  region net X011: 5676.07,2492.09 5676.07,2510.09 5667.67,2506.1 5667.67,2496.1
  region net X012: 5656.07,2518.1 5656.07,2536.1 5647.67,2532.1 5647.67,2522.1
  region net X013: 5635.07,2543.1 5635.07,2561.1 5626.67,2557.1 5626.67,2547.1
  region net X014: 5656.06,2569.27 5656.05,2587.27 5647.66,2583.27 5647.65,2573.27
  region net X015: 5674.65,2613.65 5674.61,2595.65 5666.22,2599.67 5666.24,2609.67
  region net X016: 5693.63,2621.64 5693.63,2639.64 5685.23,2635.64 5685.23,2625.64
  region net X09: 5593.63,2429.64 5593.63,2447.64 5585.23,2443.64 5585.23,2433.64
  region net QD4: 5673.98,2442.61 5673.9,2424.61 5682.32,2428.57 5682.36,2438.57
  region net RCLK: 5668.5,2672.64 5668.5,2690.64 5676.9,2686.64 5676.9,2676.64
  region net SRCLK: 5636.5,2698.64 5636.5,2716.64 5644.9,2712.64 5644.9,2702.64
  region net A: 5292.2,2723.64 5292.2,2741.64 5300.6,2737.64 5300.6,2727.64
  region net B: 5265.2,2749.64 5265.2,2767.64 5273.6,2763.64 5273.6,2753.64
  region net C: 5289.74,2776.14 5288.63,2794.11 5297.26,2790.64 5297.88,2780.64
  region net QD4: 8945.05,2601.65 8945.01,2583.65 8936.62,2587.67 8936.64,2597.67
  region net RCLK: 9207.93,2638.66 9207.87,2656.66 9216.29,2652.69 9216.32,2642.69
  region net RCLK: 9192.03,2638.64 9192.02,2656.64 9183.63,2652.64 9183.63,2642.64
  region net SRCLK: 9177.23,2666.66 9177.18,2684.66 9185.59,2680.69 9185.62,2670.69
  region net SRCLK: 9161.34,2666.63 9161.31,2684.63 9152.92,2680.61 9152.94,2670.61
  region net A: 8524.23,2710.61 8524.17,2692.61 8532.59,2696.59 8532.62,2706.59
  region net A: 8517.02,2689.66 8504.29,2702.38 8501.18,2693.61 8508.25,2686.55
  region net B: 8552.23,2736.61 8552.18,2718.61 8560.59,2722.59 8560.62,2732.59
  region net B: 8536.33,2718.64 8536.33,2736.64 8527.93,2732.64 8527.93,2722.64
  region net C: 8581.23,2761.61 8581.18,2743.61 8589.59,2747.59 8589.62,2757.59
  region net C: 8565.33,2743.64 8565.33,2761.64 8556.93,2757.64 8556.93,2747.64
  region net X3: 8525.34,2541.63 8525.31,2559.63 8516.92,2555.61 8516.94,2545.61
  region net X0: 8527.36,2509.62 8527.32,2527.62 8518.93,2523.61 8518.95,2513.61
  region net X1: 8524.34,2477.62 8524.31,2495.62 8515.92,2491.61 8515.94,2481.61
  region net X2: 8515.49,2443.73 8513.28,2461.6 8505.43,2456.64 8506.67,2446.64
  region net X5: 8728.33,2543.64 8728.33,2561.64 8719.93,2557.64 8719.93,2547.64
  region net X7: 8749.33,2517.64 8749.33,2535.64 8740.93,2531.64 8740.93,2521.64
  region net X6: 8780.33,2510.5 8780.32,2492.5 8771.92,2496.51 8771.93,2506.51
  region net X4: 8802.33,2466.91 8802.33,2484.91 8793.93,2480.91 8793.93,2470.91
  region net X08: 9212.63,2566.64 9212.62,2584.64 9204.23,2580.64 9204.23,2570.64
  region net X07: 9186.63,2536.64 9186.62,2554.64 9178.23,2550.64 9178.23,2540.64
  region net X06: 9209.63,2509.64 9209.63,2527.64 9201.23,2523.64 9201.23,2513.64
  region net X05: 9193.63,2477.63 9193.63,2495.63 9185.23,2491.64 9185.23,2481.64
  region net X04: 9215.63,2448.64 9215.62,2466.64 9207.23,2462.64 9207.22,2452.64
  region net X03: 9257.45,2419.64 9257.45,2437.64 9249.05,2433.64 9249.05,2423.64
  region net X02: 9351.27,2431.71 9333.27,2431.69 9337.27,2423.3 9347.27,2423.3
  region net X01: 9382.54,2363.39 9369.82,2350.66 9378.59,2347.55 9385.66,2354.63
  region net X_IN3: 8941.24,2526.32 8928.53,2539.07 8937.3,2542.17 8944.36,2535.09
  region net D21_2: 7996.32,2861.95 7996.32,2910.7 7973.57,2891.32 7973.57,2881.32
  region net D22_2: 7473.58,2888.36 7508.06,2853.89 7478.27,2851.5 7471.2,2858.57
  region net D32_2: 2412.3,2864.84 2363.55,2864.83 2382.93,2842.08 2392.93,2842.08
  region net D23_2: 6972.72,2861.95 6972.72,2910.7 6949.97,2891.32 6949.97,2881.32
  region net D20_2: 8508.12,2861.95 8508.11,2910.7 8485.37,2891.32 8485.37,2881.32
  region net D31_2: 2907.24,2854.71 2867.4,2882.81 2870.06,2853.09 2878.36,2847.24
  region net D24_2: 6460.92,2861.95 6460.91,2910.7 6438.17,2891.32 6438.17,2881.32
  region net R2_2: 9520.87,2888.38 9555.34,2853.91 9525.56,2851.52 9518.49,2858.59
  region net D25_2: 5938.18,2888.38 5972.63,2853.89 5942.84,2851.52 5935.78,2858.6
  region net C2_1: 10032.67,2888.38 10067.15,2853.91 10037.36,2851.52 10030.29,2858.59
  region net D26_2: 5437.32,2861.95 5437.32,2910.7 5414.57,2891.32 5414.57,2881.32
  region net D29_2: 3901.82,2861.95 3901.81,2910.7 3879.07,2891.32 3879.07,2881.32
  region net D27_2: 4914.58,2888.36 4949.06,2853.89 4919.27,2851.5 4912.2,2858.57
  region net D28_2: 4413.72,2861.95 4413.71,2910.7 4390.97,2891.32 4390.97,2881.32
  region net D19_2: 9009.08,2888.36 9043.56,2853.89 9013.77,2851.5 9006.7,2858.57
  region net D30_2: 3390.02,2861.95 3390.02,2910.7 3367.27,2891.32 3367.27,2881.32
  region net A: 10668.26,2928.62 10623.26,2928.67 10640.77,2940.99 10650.77,2940.98
  region net B: 10665.61,2807.63 10665.56,2852.63 10686.58,2835.15 10686.59,2825.15
  region net SRCLK: 10547.24,2852.65 10547.15,2807.65 10526.19,2825.19 10526.21,2835.19
  region net RCLK: 10547.19,2773.85 10547.12,2728.85 10526.15,2746.39 10526.17,2756.39
  region net C: 10665.62,2728.85 10665.55,2773.85 10686.58,2756.39 10686.59,2746.39
  region net X_IN3: 10665.59,2650.09 10665.58,2695.09 10686.58,2677.59 10686.58,2667.59
  region net X_IN4: 10668.26,2574.02 10623.26,2573.98 10640.77,2554.78 10650.77,2554.79
  pour cut-out: 1807.42,1500 1514.42,1500 1514.42,1792 1807.42,1792
  pour cut-out: 10686.57,1792.4 10979.57,1792.4 10979.57,1500.4 10686.57,1500.4
  pour cut-out: 6099.96,1792.4 6392.96,1792.4 6392.96,1500.4 6099.96,1500.4
  pour cut-out: 10686.57,3485.31 10979.57,3485.31 10979.57,3193.31 10686.57,3193.31
  pour cut-out: 6099.96,3485.31 6392.96,3485.31 6392.96,3193.31 6099.96,3193.31
  pour cut-out: 1513.35,3485.31 1806.35,3485.31 1806.35,3193.31 1513.35,3193.31

## Silkscreen, mask and mechanical layers (free items; w line width, h text height)
Top Overlay:
  circle w10: c1660.38,1646.2 r137.8
  circle w10: c10833.6,1646.2 r137.8
  circle w10: c6246.99,1646.2 r137.8
  circle w10: c10833.6,3339.11 r137.8
  circle w10: c6246.99,3339.11 r137.8
  circle w10: c1660.38,3339.11 r137.8
  text "20211019" at 5972.4,3336.01 h78.74 r180
  text "HX-SMJ-03-B" at 7262.39,3325.01 h78.74 r180
  text "S8" at 10528.11,2880.29 h31.5 r90
  text "S3" at 10473.11,2878.29 h31.5 r90
  text "S7" at 10528.9,2799.92 h31.5 r90
  text "S2" at 10475.69,2798.56 h31.5 r90
  text "S1" at 10475.9,2728.92 h31.5 r90
  text "S6" at 10532.11,2725.29 h31.5 r90
  text "5V" at 10477.11,2647.29 h31.5 r90
  text "S5" at 10530.11,2647.29 h31.5 r90
  text "S4" at 10533.11,2568.29 h31.5 r90
  text "DGND" at 10475.11,2514.29 h31.5 r90
Document:
  lines w0.1: 6238.79,2491.65 6240.79,2493.65